# EAGLE board transceiver (3) - Copy (EAGLE 6.4)
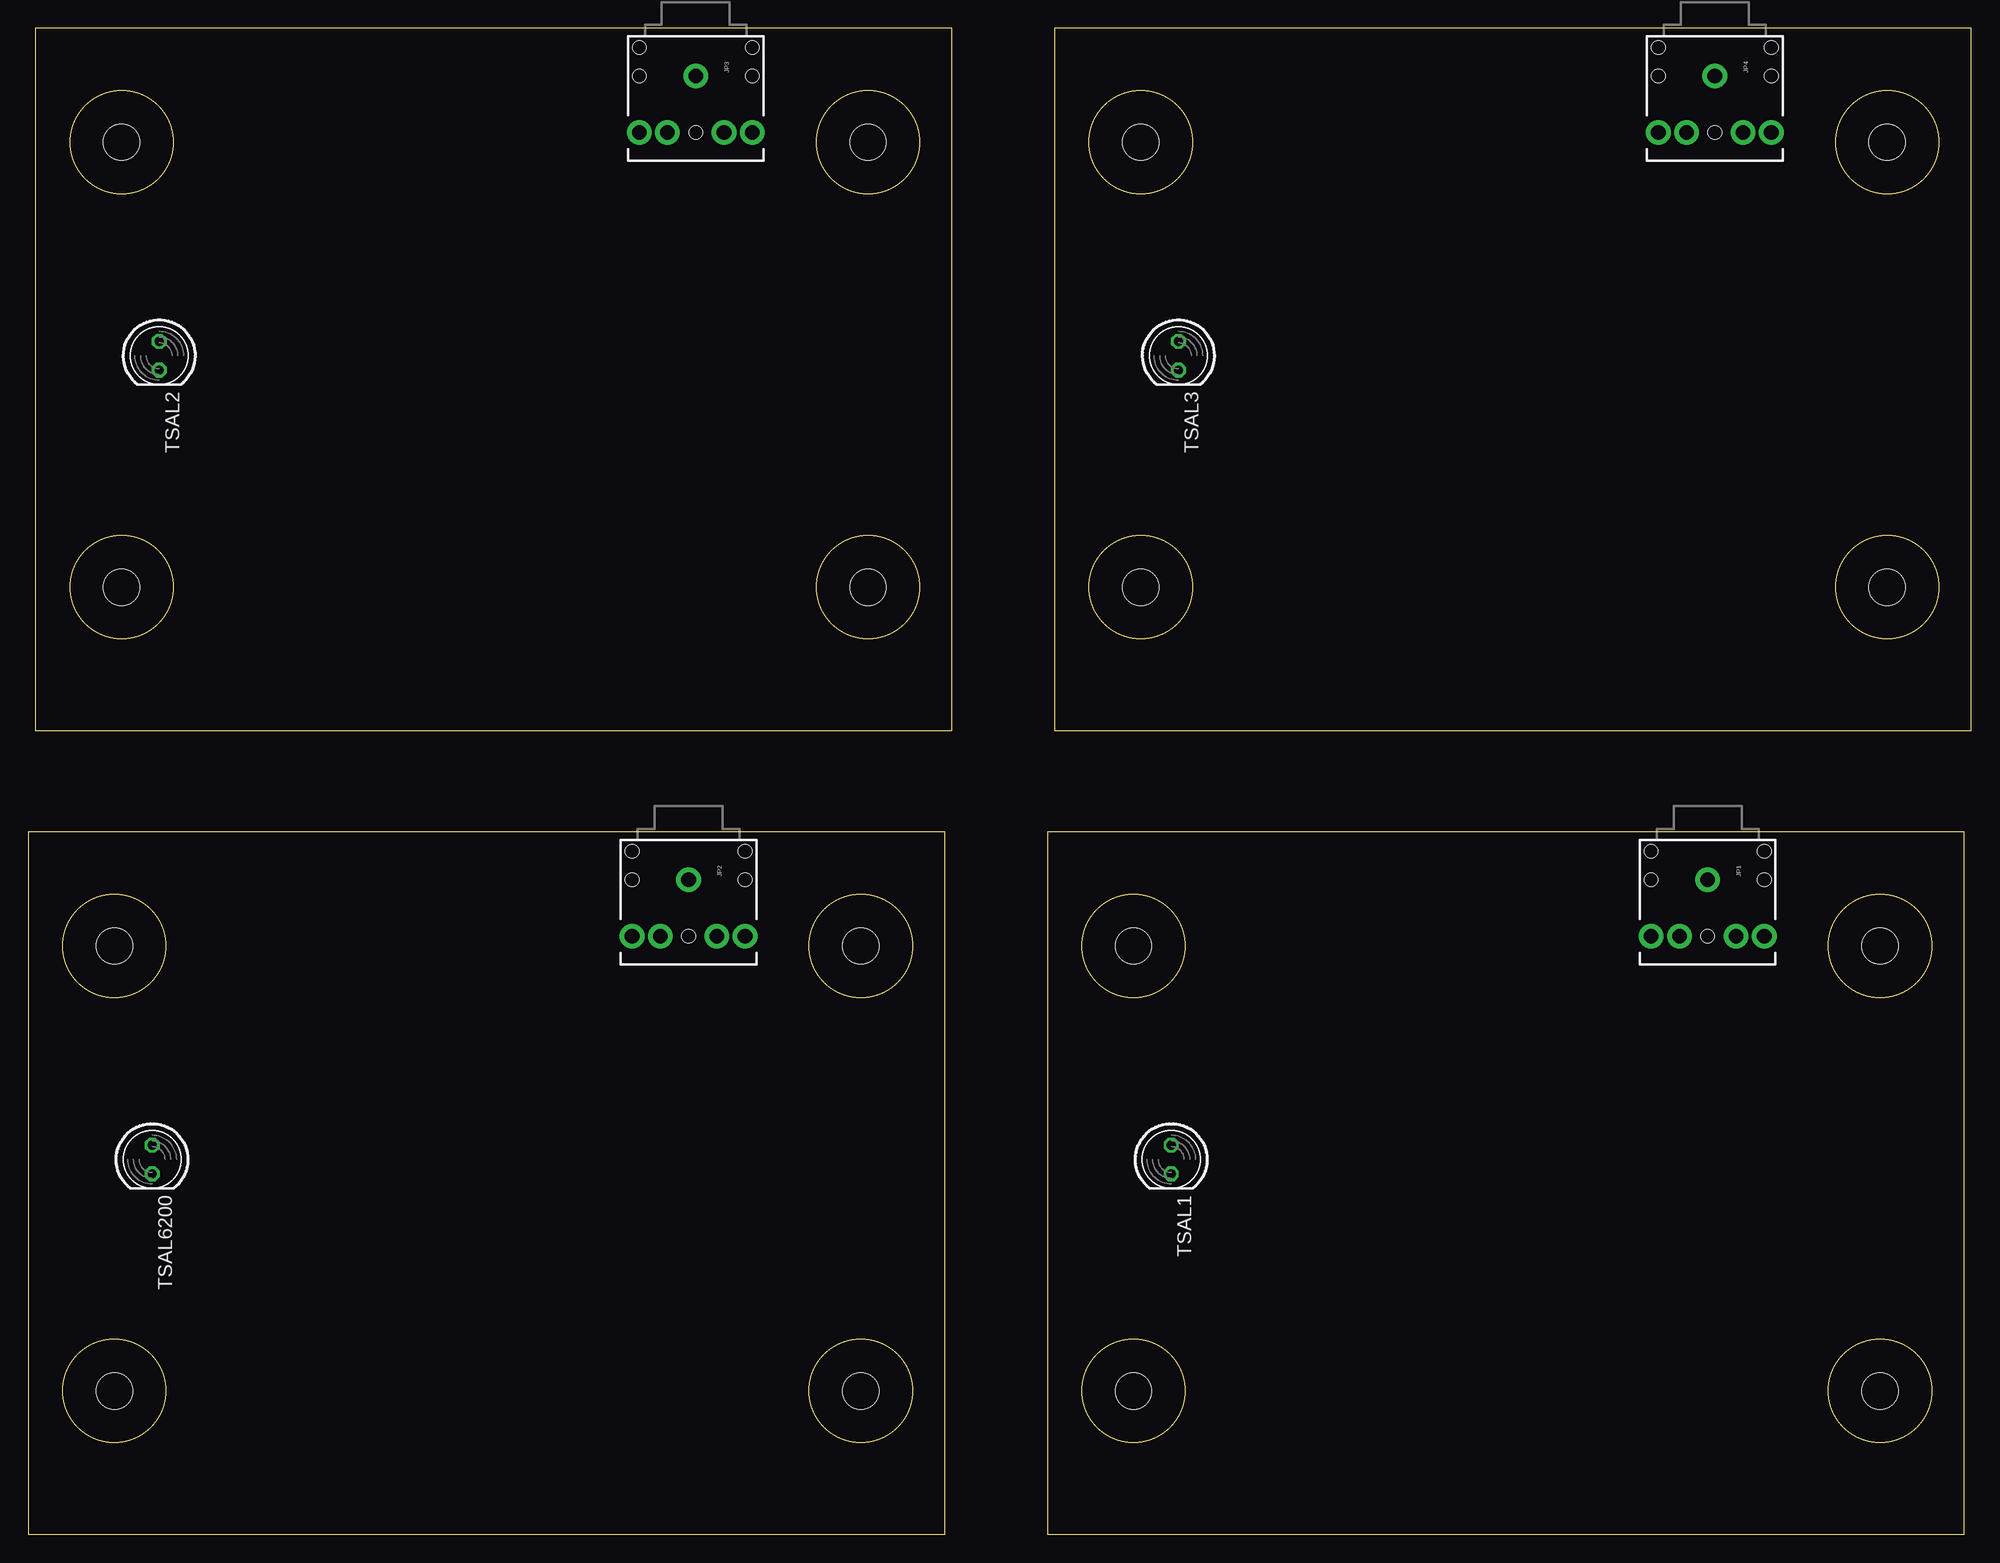
[diagram p0: board, top side]
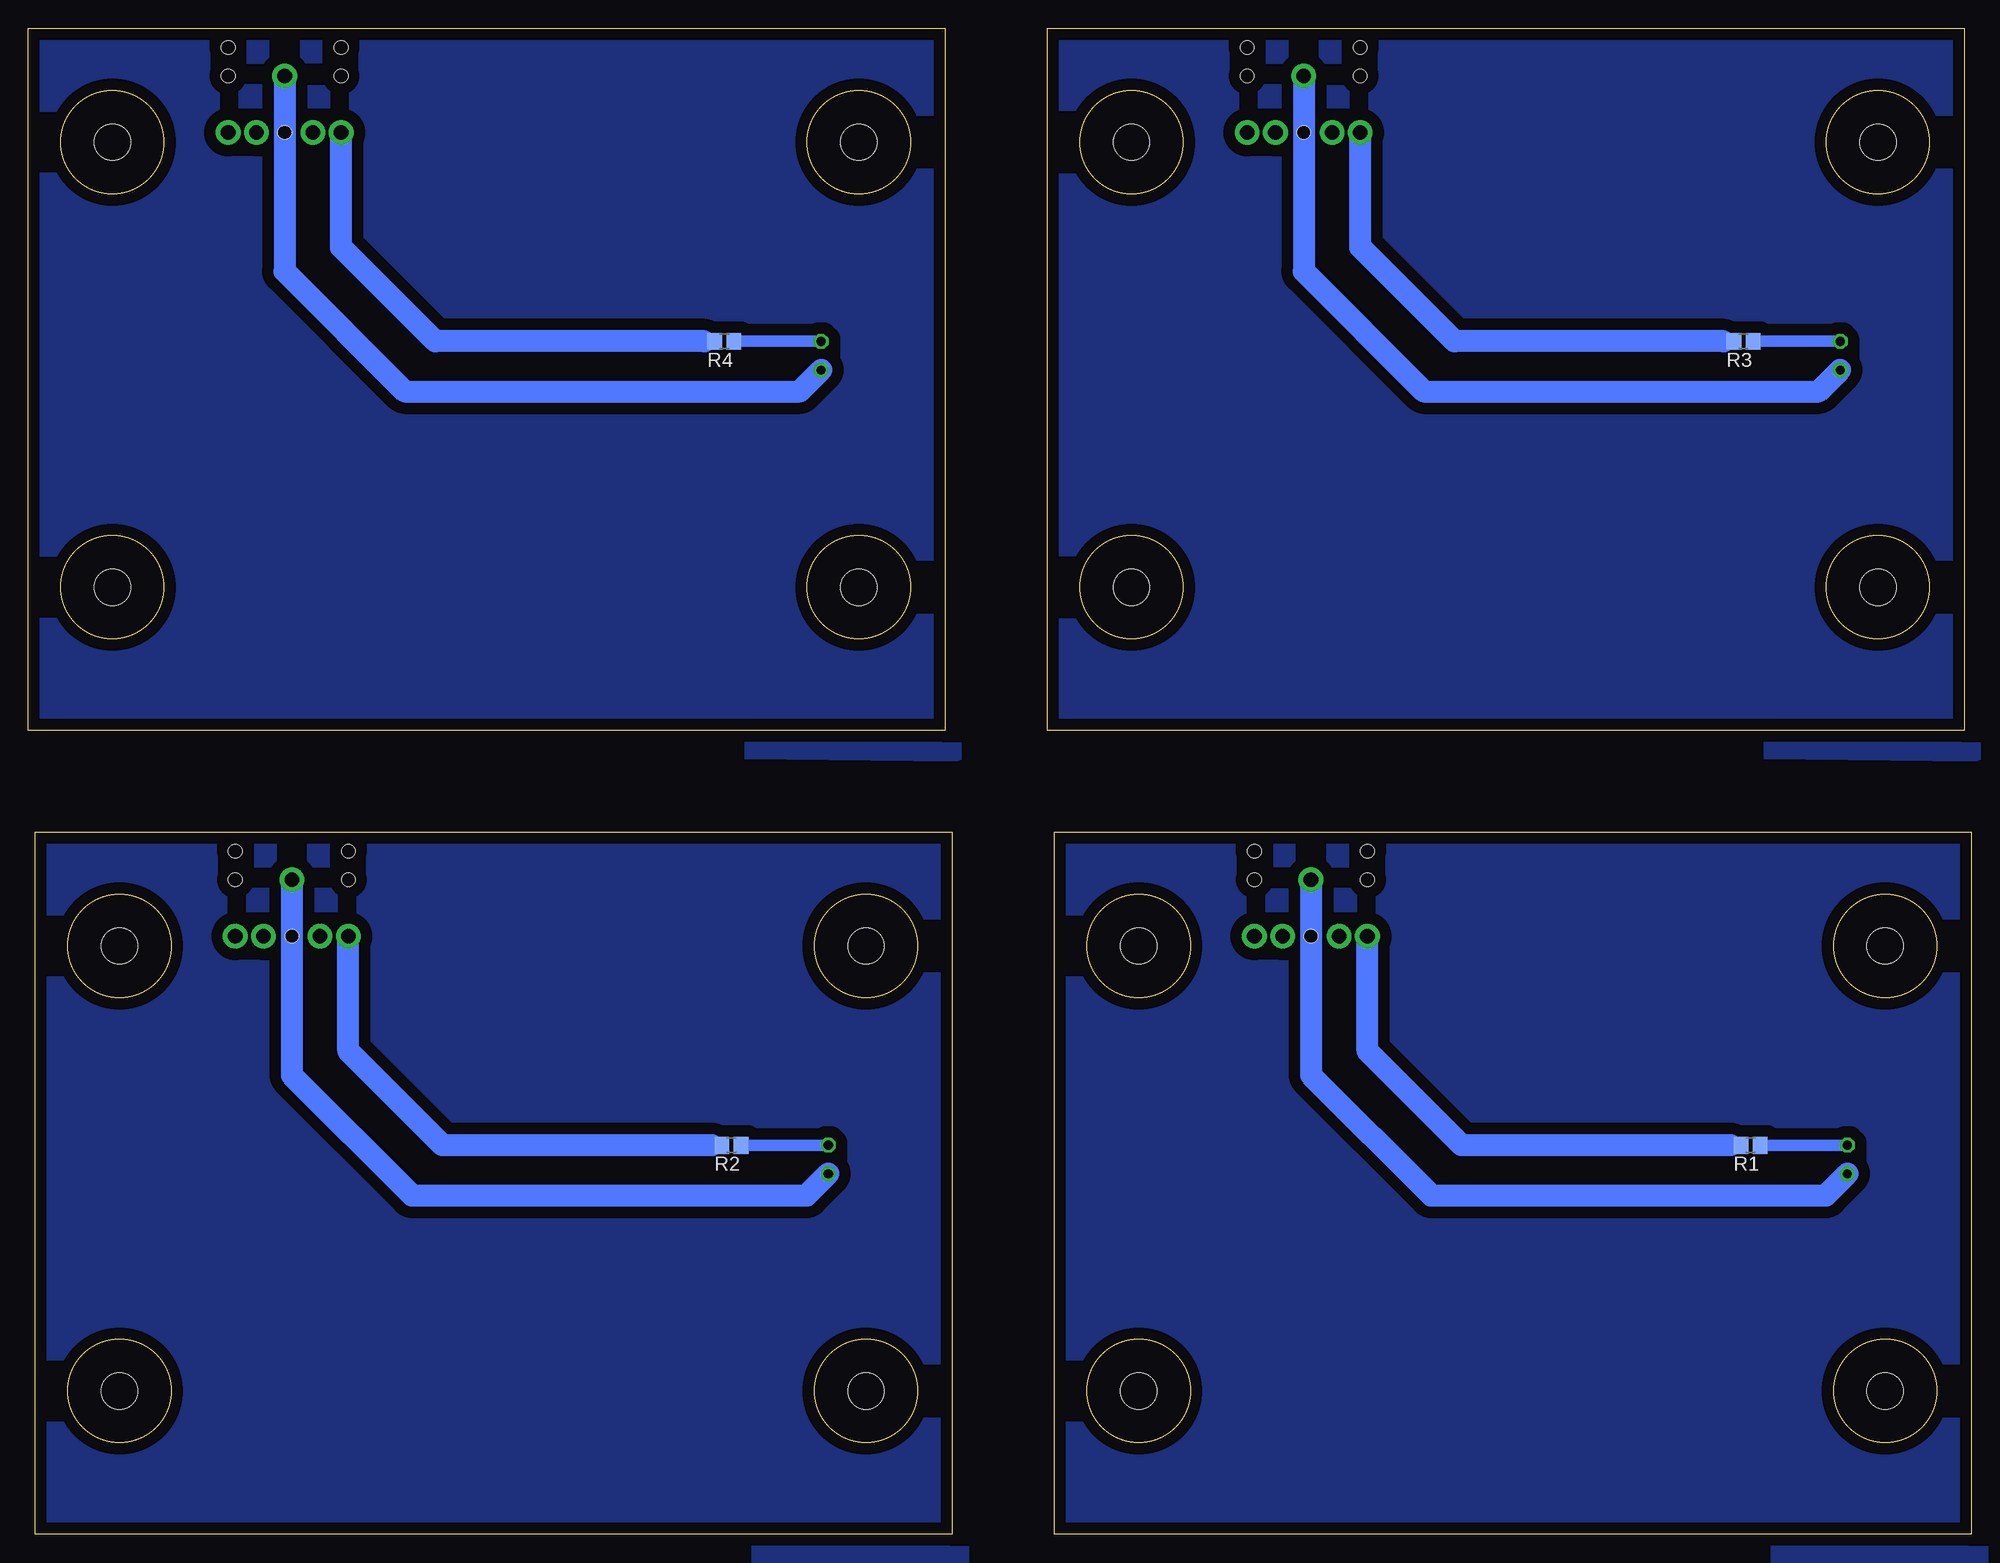
[diagram p1: board, bottom side, seen from below]

Size 171.91 x 133.27 mm. Coordinates in mm from the lower left corner, seen from the top.
Outline: 0,0 81.1,0 81.1,62.15 0,62.15 0,0
Outline: 90.17,0 171.27,0 171.27,62.15 90.17,62.15 90.17,0
Outline: 0.63,71.12 81.74,71.12 81.74,133.27 0.63,133.27 0.63,71.12
Outline: 90.8,71.12 171.91,71.12 171.91,133.27 90.8,133.27 90.8,71.12
Outline: circle at 73.66,52.07 radius 4.57
Outline: circle at 73.66,12.7 radius 4.57
Outline: circle at 7.62,12.7 radius 4.57
Outline: circle at 7.62,52.07 radius 4.57
Outline: circle at 163.83,52.07 radius 4.57
Outline: circle at 163.83,12.7 radius 4.57
Outline: circle at 97.79,12.7 radius 4.57
Outline: circle at 97.79,52.07 radius 4.57
Outline: circle at 74.3,123.19 radius 4.57
Outline: circle at 74.3,83.82 radius 4.57
Outline: circle at 8.25,83.82 radius 4.57
Outline: circle at 8.25,123.19 radius 4.57
Outline: circle at 164.47,123.19 radius 4.57
Outline: circle at 164.47,83.82 radius 4.57
Outline: circle at 98.42,83.82 radius 4.57
Outline: circle at 98.42,123.19 radius 4.57
Copper layers (1*16): Top 0.035mm / dielectric 1.5mm / Bottom 0.035mm
Design rules "default": minimum track width 10mil, minimum drill 24mil, track to track 8mil, track to pad 8mil, pad to pad 8mil, via to via 8mil, smd to smd 8mil, copper to edge 40mil, drill to drill 8mil, minimum pad ring 10mil, minimum via ring 8mil, stop-mask expansion 4mil, vias tented up to drill 0mil, thermal gap 10mil
Holes 3.2 mm at 7.62,52.07 7.62,12.7 73.66,12.7 73.66,52.07 97.79,52.07 97.79,12.7 163.83,12.7 163.83,52.07 8.25,123.19 8.25,83.82 74.3,83.82 74.3,123.19 98.42,123.19 98.42,83.82 164.47,83.82 164.47,123.19

## Footprints (pad centres in the part's own frame; a part is rotated, then mirrored left to right if it is on the bottom)
AUDIO-JACK = drill 1.3 pad 2.184: RING 5,5; RSH 5,2.5; SLEEVE 0,0; TIP 5,-5; TSH 5,-2.5 | hole 1.2: 0,5; -2.5,5; -2.5,-5; 0,-5; 5,0
R0805 = smd 1.3 x 1.5: 1 -0.85,0; 2 0.85,0
LED5MM = drill 0.813 octagon: A -1.27,0; K 1.27,0

## Placement (x,y rotation side)
JP1  [AUDIO-JACK]  148.59,57.94 270 top
JP2  [AUDIO-JACK]  58.42,57.94 270 top
JP3  [AUDIO-JACK]  59.05,129.06 270 top
JP4  [AUDIO-JACK]  149.22,129.06 270 top
R1  36,5R  [R0805]  19.53,34.45 180 bottom
R2  36,5R  [R0805]  109.7,34.45 180 bottom
R3  36,5R  [R0805]  20.16,105.57 180 bottom
R4  36,5R  [R0805]  110.33,105.57 180 bottom
TSAL1  [LED5MM]  101.12,33.18 270 top
TSAL2  [LED5MM]  11.59,104.3 270 top
TSAL3  [LED5MM]  101.76,104.3 270 top
TSAL6200  [LED5MM]  10.95,33.18 270 top

## Library data of the parts
JP1-JP4 = SparkFun-Connectors
R1-R4 = resistor
TSAL1-TSAL3 TSAL6200 = led

## Nets
N$1: JP1.SLEEVE TSAL1.K
N$2: JP1.TIP R2.2
N$3: JP2.TIP R1.2
N$4: R2.1 TSAL1.A
N$5: JP3.SLEEVE TSAL2.K
N$6: JP3.TIP R3.2
N$7: R3.1 TSAL2.A
N$8: R1.1 TSAL6200.A
N$9: JP4.SLEEVE TSAL3.K
N$10: JP4.TIP R4.2
N$11: R4.1 TSAL3.A
N$22: JP2.SLEEVE TSAL6200.K

## Tracks (layer width: path | path; a pad name or v marks a point on that pad's centre or on a via)
N$1
  Bottom 1.93: JP1.SLEEVE 148.59,40.64 137.95,30 103.03,30 TSAL1.K
N$2
  Bottom 1.016: R2.2 111.44,34.45
  Bottom 1.93: 111.44,34.45 135.25,34.45 143.59,42.78 JP1.TIP
N$3
  Bottom 1.016: R1.2 21.27,34.45
  Bottom 1.93: 21.27,34.45 45.08,34.45 53.42,42.78 JP2.TIP
N$4
  Bottom 1.016: TSAL1.A R2.1
N$5
  Bottom 1.93: JP3.SLEEVE 59.05,111.76 48.42,101.12 13.49,101.12 TSAL2.K
N$6
  Bottom 1.016: R3.2 21.91,105.57
  Bottom 1.93: 21.91,105.57 45.72,105.57 54.05,113.9 JP3.TIP
N$7
  Bottom 1.016: TSAL2.A R3.1
N$8
  Bottom 1.016: TSAL6200.A R1.1
N$9
  Bottom 1.93: JP4.SLEEVE 149.22,111.76 138.59,101.12 103.66,101.12 TSAL3.K
N$10
  Bottom 1.016: R4.2 112.08,105.57
  Bottom 1.93: 112.08,105.57 135.89,105.57 144.22,113.9 JP4.TIP
N$11
  Bottom 1.016: TSAL3.A R4.1
N$22
  Bottom 1.93: JP2.SLEEVE 58.42,40.64 47.78,30 12.86,30 TSAL6200.K
S$1
  pour Bottom (isolate 1.016): 89.22,63.66 171.93,63.02 171.45,-0.79 89.22,-1.75
S$2
  pour Bottom (isolate 1.016): -0.32,134.78 82.39,134.14 81.91,70.33 -0.32,69.37
S$3
  pour Bottom (isolate 1.016): 89.85,134.78 172.56,134.14 172.09,70.33 89.85,69.37
S$8
  pour Bottom (isolate 1.016): -0.95,63.66 81.76,63.02 81.28,-0.79 -0.95,-1.75